# Altium PCB PCB.PcbDoc
Units mm, origin at the board's own origin, x right, y up, seen from the top; angles counter-clockwise.
Board outline 26 x 26 mm, 4 copper layers (Top Layer, GND, Power, Bottom Layer), stack 1.586 mm thick; 37 components, 23 nets, 158 pads, 109 vias.
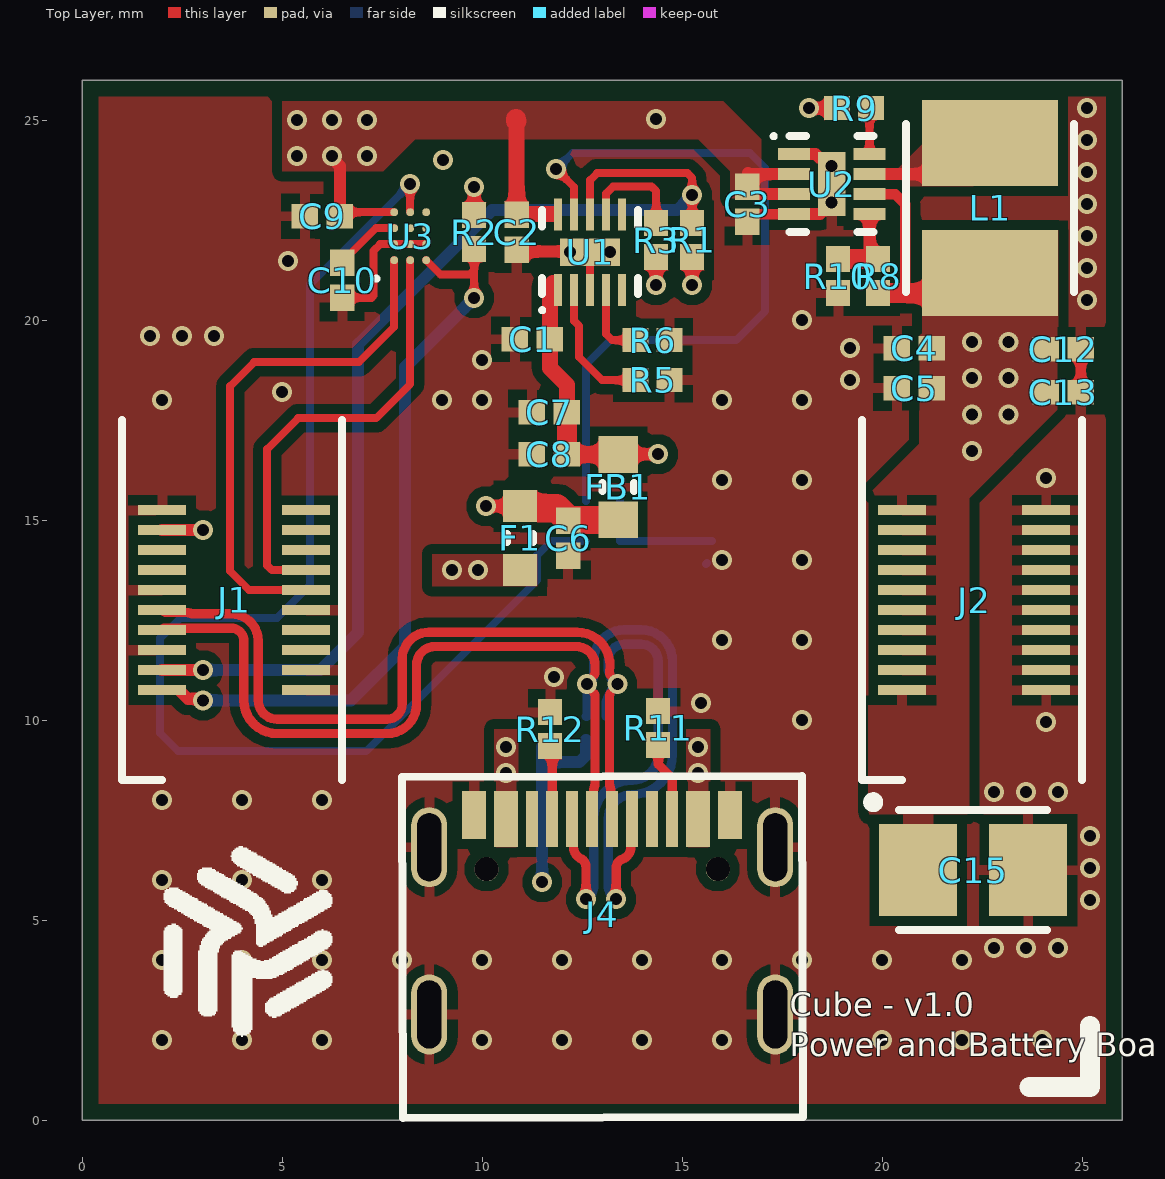
[diagram p0: Top Layer view]
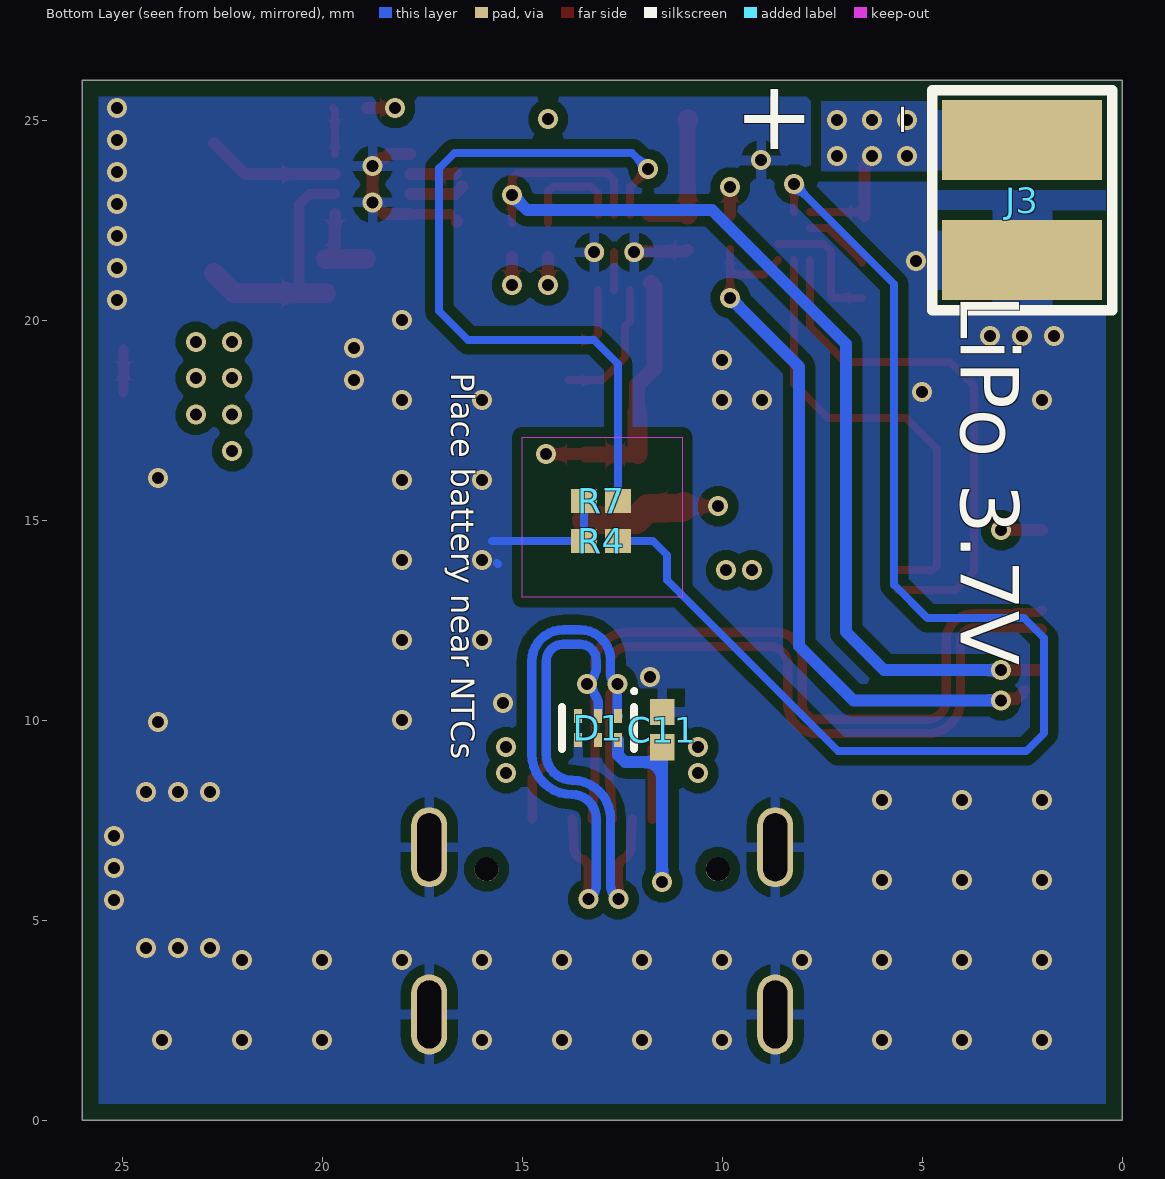
[diagram p1: Bottom Layer view, seen from below]
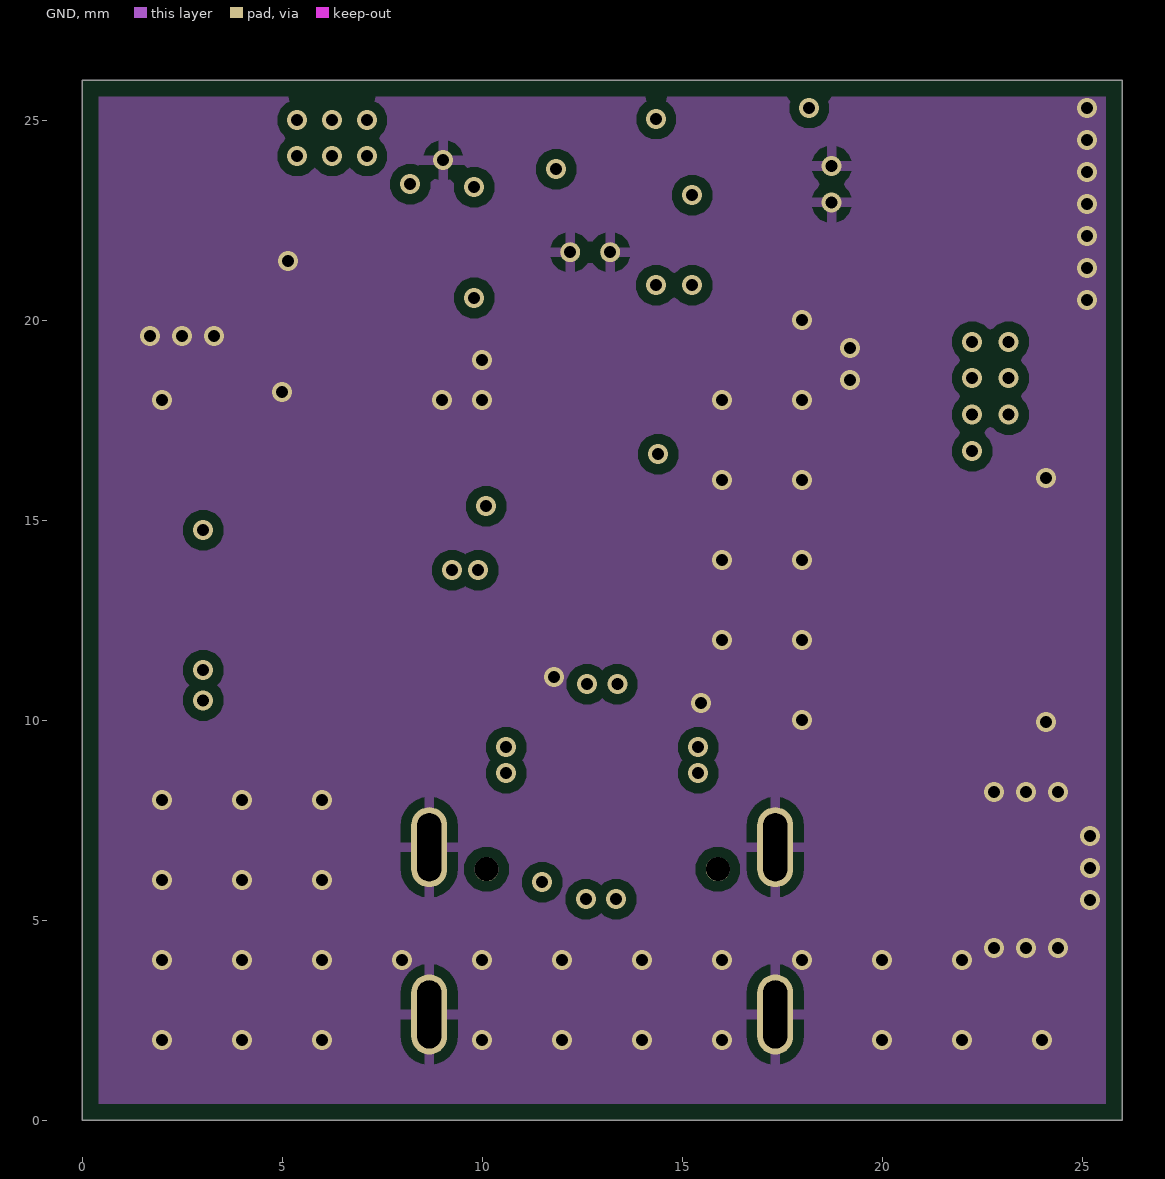
[diagram p2: GND]
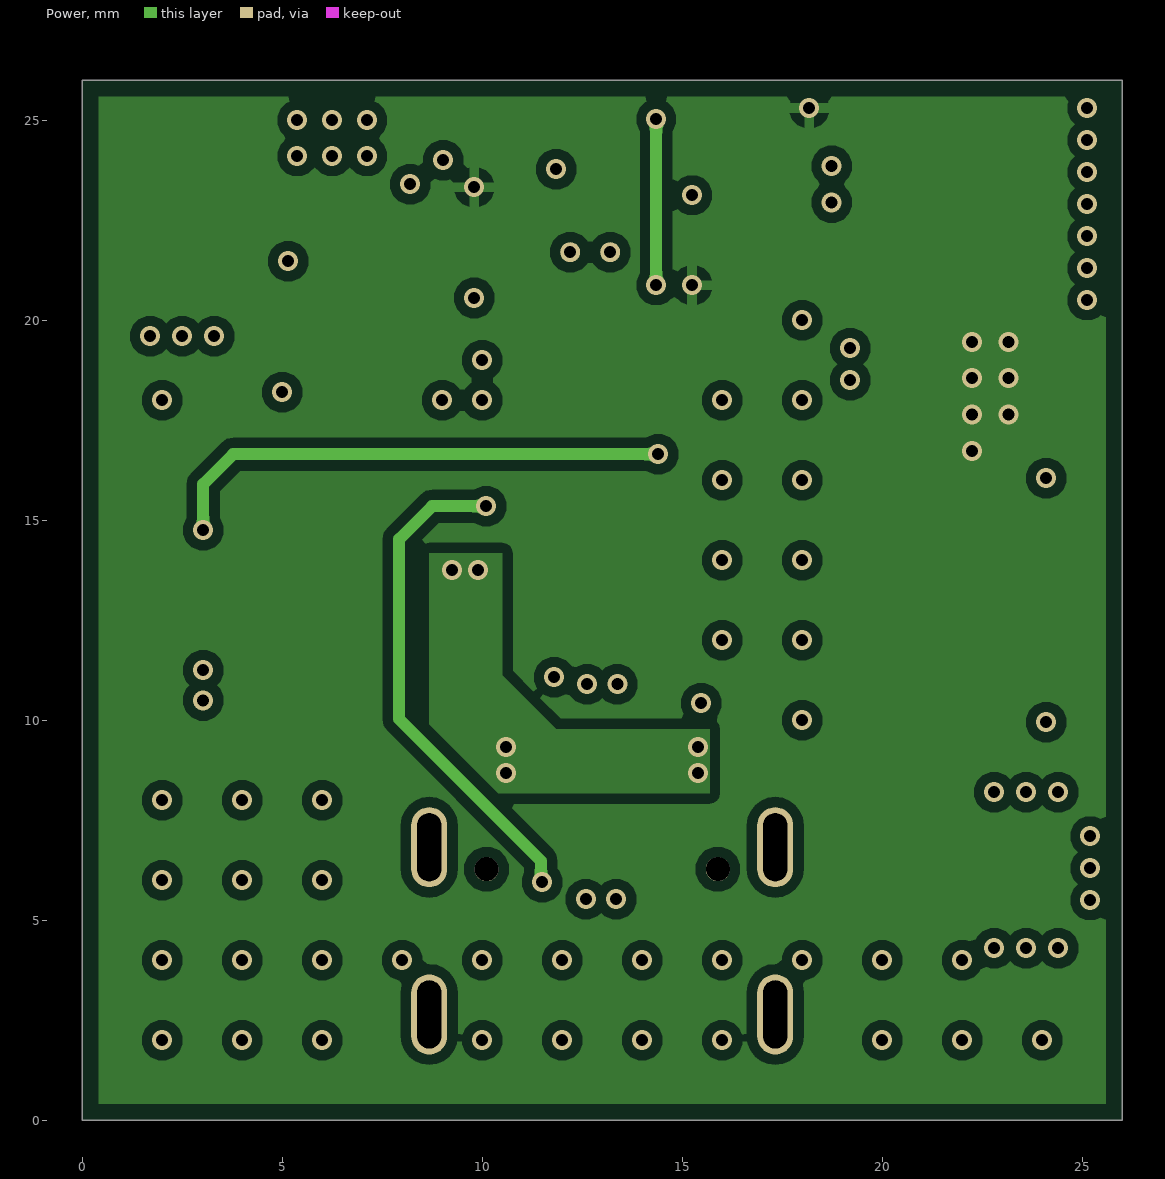
[diagram p3: Power]

## Layer stack, top to bottom
Top Solder: solder mask 0.0102, Solder Resist, Dk 3.5
Top Layer: signal copper 0.035
Dielectric 2: prepreg 0.2104, PP-006, Dk 4.6
GND: signal copper 0.0152
Dielectric 1: core 1.065, Core-025, Dk 4.6
Power: signal copper 0.0152
Dielectric 3: prepreg 0.2104, PP-006, Dk 4.6
Bottom Layer: signal copper 0.035
Bottom Solder: solder mask 0.0102, Solder Resist, Dk 3.5

## Board outline
0,0 0,26 26,26 26,0

## Design rules (kind name [scope] priority, off if disabled: settings)
BoardOutlineClearance [All] p1: gap=0.4 ignorepadtopadclearanceinfootprint=FALSE
Clearance [All] p1: gap=0.254 ignorepadtopadclearanceinfootprint=FALSE except(0: Arc-Hole Track-Hole SMDPad-Hole THPad-Hole Via-Hole Fill-Hole Poly-Hole Region-Hole Text-Hole; 0.09: Arc-Arc Arc-Track Track-Track; 0.127: SMDPad-SMDPad; 0.2: Arc-SMDPad Track-SMDPad; 0.33: Arc-THPad Track-THPad; 0.5: THPad-THPad)
DiffPairsRouting DiffPairs_USB [InDifferentialPairClass('USB')] p1: maxlimit=0.254 minlimit=0.127 mostfreqgap=0.254 toplayer_maxgap=0.127 toplayer_prefgap=0.127 toplayer_minwidth=0.232 toplayer_maxwidth=0.232 toplayer_prefwidth=0.232 bottomlayer_maxgap=0.127 bottomlayer_prefgap=0.127 bottomlayer_minwidth=0.232 bottomlayer_maxwidth=0.232 bottomlayer_prefwidth=0.232 impedanceprofiledriven=TRUE impedanceprofileid={58094A1F-92C8-4BD8-B7AC-1BFEEA8435DD} impedanceprofilevalue=90.000000 maxuncoupledlength=12.7
DiffPairsRouting [All] p2: maxlimit=0.254 minlimit=0.254 mostfreqgap=0.254 toplayer_minwidth=0.381 toplayer_maxwidth=0.381 toplayer_prefwidth=0.381 midlayer1_minwidth=0.381 midlayer1_maxwidth=0.381 midlayer1_prefwidth=0.381 midlayer2_minwidth=0.381 midlayer2_maxwidth=0.381 midlayer2_prefwidth=0.381 bottomlayer_minwidth=0.381 bottomlayer_maxwidth=0.381 bottomlayer_prefwidth=0.381 maxuncoupledlength=12.7
PolygonConnect [All] p1: connectstyle=Relief reliefconductorwidth=0.254 reliefentries=4 polygonreliefangle="90 Angle" airgapwidth=0.254
PolygonConnect PolygonConnect_5V [InNet('+5V') vs InNet('+5V')] p2: thpad.connectstyle=Direct thpad.reliefconductorwidth=0.254 thpad.reliefentries=4 thpad.polygonreliefangle="90 Angle" thpad.airgapwidth=0.254 smdpad.connectstyle=Direct smdpad.reliefconductorwidth=0.254 smdpad.reliefentries=4 smdpad.polygonreliefangle="90 Angle" smdpad.airgapwidth=0.254 via.connectstyle=Relief via.reliefconductorwidth=0.254 via.reliefentries=4 via.polygonreliefangle="90 Angle" via.airgapwidth=0.254
PolygonConnect PolygonConnect_VBAT [InNet('+VBAT') vs InNet('+VBAT')] p3: thpad.connectstyle=Direct thpad.reliefconductorwidth=0.254 thpad.reliefentries=4 thpad.polygonreliefangle="90 Angle" thpad.airgapwidth=0.254 smdpad.connectstyle=Direct smdpad.reliefconductorwidth=0.254 smdpad.reliefentries=4 smdpad.polygonreliefangle="90 Angle" smdpad.airgapwidth=0.254 via.connectstyle=Relief via.reliefconductorwidth=0.254 via.reliefentries=4 via.polygonreliefangle="90 Angle" via.airgapwidth=0.254
RoutingVias [All] p1: holewidth=0.711 width=1.27 viastyle="Through Hole" minholewidth=0.2 minwidth=0.4 maxholewidth=0.711 maxwidth=1.27
SolderMaskExpansion [All] p1: expansion=0.102 istentingtop=FALSE
Width [All] p1: maxlimit=2 minlimit=0.09 preferedwidth=0.254 minimp=50.000000 maximp=50.000000 favimp=50.000000
29 further rules are at their usual default settings.

## Classes and differential pairs
net class USB: USB_N USB_P
differential pair class USB: USB
component class "04 USB": C6 C7 C8 C11 D1 F1 FB1 J4 R11 R12
component class "03 BATTERY MANAGEMENT": C1 C2 C3 C4 C5 C9 C10 C12 C13 C15 J3 L1 R1 R2 R3 R4 R5 R6 R7 R8 R9 R10 U1 U2 U3
component class "02 CONNECTION": J1 J2
differential pair USB: +USB_P -USB_N

## Components (designator, comment, footprint, x,y, rotation, side; value= is the part's Value field where it differs from the comment)
C1 "4.7uF/10V" CAPC1005X06N 11.25,19.525 r0 top
C2 "4.7uF/10V" CAPC1005X06N 10.862,22.2 r90 top
C3 "10uF/6.3V" CAPC1005X06N 16.625,22.9 r90 top
C4 "10uF/6.3V" CAPC1005X06N 20.8,19.3 r0 top
C5 "10uF/6.3V" CAPC1005X06N 20.8,18.3 r0 top
C6 "10nF/50V" CAPC1005X06N 12.15,14.55 r90 top
C7 "100nF/50V" CAPC1005X06N 11.675,17.7 r0 top
C8 "4.7uF/10V" CAPC1005X06N 11.675,16.65 r0 top
C9 "1uF/25V" CAPC1005X06N 6,22.6 r0 top
C10 "2.2uF/6.3V" CAPC1005X06N 6.5,21 r90 top
C11 "100nF/50V" CAPC1005X06N 11.5,9.765 r270 bottom
C12 "10uF/6.3V" CAPC1005X06N 24.525,19.275 r180 top
C13 "2.2uF/6.3V" CAPC1005X06N 24.525,18.2 r180 top
C15 "100uF/6.3V" CAPMP3528X21N 22.275,6.25 r0 top
D1 "TPD4S012DRYR" SON50P100X60-6N 13.1,9.8 r270 bottom
F1 "1.5A/32V" F0603HI1500V032T 10.95,14.55 r90 top
FB1 "1.8A" INDC1608X10N 13.4,15.825 r90 top
J1 "0537480208" 0537480208 2,10.75 r90 top
J2 "0537480208" 0537480208 20.5,10.75 r90 top
J3 "3.7V/500mAh" BATTERY_SMD_CONN 2.5,24.5 r270 bottom
J4 "TYPE-C-31-M-12" TYPE-C-31-M-12 13,7.325 r0 top
L1 "2.2uH/1.32A" INDP4040X12N 22.7,22.8 r270 top
R1 "100K/1%" RESC1005X04N 15.25,22 r90 top
R2 "100K/1%" RESC1005X04N 9.8,22.2 r270 top
R3 "0" RESC1005X04N 14.35,22 r270 top
R4 "10K" RESC1005X04N 13.025,14.475 r180 bottom
R5 "1K4/1%" RESC1005X04N 14.262,18.5 r180 top
R6 "2K8/1%" RESC1005X04N 14.262,19.5 r180 top
R7 "10K" RESC1005X04N 13.025,15.475 r180 bottom
R8 "562k/1%" RESC1005X04N 19.9,21.1 r270 top
R9 "100K/1%" RESC1005X04N 19.3,25.3 r0 top
R10 "180K/1%" RESC1005X04N 18.9,21.1 r90 top
R11 "5K11/1%" RESC1005X04N 14.4,9.8 r270 top
R12 "5K11/1%" RESC1005X04N 11.7,9.775 r270 top
U1 "BQ24045DSQR" SON40P200X80_HS-11N 12.7,21.7 r90 top
U2 "TPS62160DSGR" SON50P200X80_HS-9N 18.738,23.4 r0 top
U3 "LC709204FXE-01TBG" BGA12C40P4X3_191X148X51 8.2,22.1 r90 top

## Footprints (in the part's own frame and the unit in brackets; to place one, negate y for a bottom-side part, rotate by r counter-clockwise, add the part's x,y. Pads: shape width x height; smd on the part's side, far side on the other; paste and mask are expansions set on the pad)
0537480208 [mm]
  rect 0.25x1.2 smd: 1(0,0) 2(0.5,0) 3(1,0) 4(1.5,0) 5(2,0) 6(2.5,0) 7(3,0) 8(3.5,0) 9(4,0) 10(4.5,0) 11(0,-3.6) 12(0.5,-3.6) 13(1,-3.6) 14(1.5,-3.6) 15(2,-3.6) 16(2.5,-3.6) 17(3,-3.6) 18(3.5,-3.6) 19(4,-3.6) 20(4.5,-3.6)
  silkscreen extent -2.25,-4.5 6.75,1, body extent -2.15,-3.9 6.65,0.4, height 2.44
BATTERY_SMD_CONN [mm]
  rect 2x4 smd: 1(0,0) 2(3,0)
  silkscreen extent -1.25,-2.25 4.25,2.25
BGA12C40P4X3_191X148X51 [mm] "BGA, 12-Leads, Body 1.91x1.48mmx0.51mm, Pitch 0.40mm"
  round 0.2 smd: A1(-0.6,0.4) A2(-0.2,0.4) A3(0.2,0.4) A4(0.6,0.4) B1(-0.6,0) B2(-0.2,0) B3(0.2,0) B4(0.6,0) C1(-0.6,-0.4) C2(-0.2,-0.4) C3(0.2,-0.4) C4(0.6,-0.4)
  silkscreen extent -1.11,0.79 -1.01,0.89, body extent -0.96,-0.74 0.95,0.74, height 0.51
CAPC1005X06N [mm] "Chip Capacitor, 2-Leads, Body 1.00x0.50mm, IPC Medium Density"
  rect 0.66x0.62 smd: 1(-0.44,0) 2(0.44,0)
  body extent -0.53,-0.28 0.53,0.27, height 0.55
CAPMP3528X21N [mm] "Molded Capacitor, 2-Leads, Body 3.50x2.80mm, IPC Medium Density"
  rect 1.95x2.3 smd: 1(-1.375,0) 2(1.375,0)
  silkscreen extent -2.62,-1.5 1.85,1.82, body extent -1.85,-1.5 1.85,1.5, height 2.1
F0603HI1500V032T [mm] "F0603HI1500V032T"
  rect 0.8x0.85 smd: 1(-0.8,0) 2(0.8,0)
  silkscreen extent -0.1,-0.33 0.1,0.33, body extent -0.8,-0.4 0.8,0.4, height 0.95
INDC1608X10N [mm] "Chip Inductor, 2-Leads, Body 1.65x0.80mm, IPC Medium Density"
  rect 0.92x0.98 smd: 1(-0.815,0) 2(0.815,0)
  silkscreen extent -0.1,-0.39 0.1,0.39, body extent -0.9,-0.48 0.9,0.47, height 0.95
INDP4040X12N [mm] "Precision Wire Wound Inductor, 2-Leads, Body 4.00x4.00mm, IPC Medium Density"
  rect 2.15x3.4 smd: 1(-1.625,0) 2(1.625,0)
  silkscreen extent -2.1,-2.1 2.1,2.1, body extent -2.1,-2.1 2.1,2.1, height 1.2
RESC1005X04N [mm] "Chip Resistor, 2-Leads, Body 1.00x0.50mm, IPC Medium Density"
  rect 0.65x0.6 smd: 1(-0.425,0) 2(0.425,0)
  body extent -0.55,-0.3 0.55,0.3, height 0.4
SON40P200X80_HS-11N [mm] "SON, 10-Leads, Body 2.00x2.00mm, Pitch 0.40mm, Thermal Pad 1.50x0.69mm, IPC Medium Density"
  rect 0.8x0.2 smd: 1(-0.945,0.8) 2(-0.945,0.4) 3(-0.945,0) 4(-0.945,-0.4) 5(-0.945,-0.8) 6(0.945,-0.8) 7(0.945,-0.4) 8(0.945,0) 9(0.945,0.4) 10(0.945,0.8)
  round 0.5 hole 0.3 mask+0.102: 11(0,0.5) 11(0,-0.5)
  rect 0.69x1.5 smd paste-2539.97: 11(0,0)
  silkscreen extent -1.5,-1.2 1.05,1.25, body extent -1.05,-1.05 1.05,1.05, height 0.8
SON50P100X60-6N [mm] "SON, 6-Leads, Body 1.45x1.00mm, Pitch 0.50mm, IPC Medium Density"
  rect 0.35x0.2 smd: 1(-0.3,0.5) 2(-0.3,0) 3(-0.3,-0.5) 4(0.3,-0.5) 5(0.3,0) 6(0.3,0.5)
  silkscreen extent -0.97,-0.9 0.53,0.95, body extent -0.53,-0.75 0.53,0.75, height 0.6
SON50P200X80_HS-9N [mm] "SON, 8-Leads, Body 2.00x2.00mm, Pitch 0.50mm, Thermal Pad 1.60x0.69mm, IPC Medium Density"
  rect 0.8x0.3 smd: 1(-0.945,0.75) 2(-0.945,0.25) 3(-0.945,-0.25) 4(-0.945,-0.75) 5(0.945,-0.75) 6(0.945,-0.25) 7(0.945,0.25) 8(0.945,0.75)
  rect 0.69x1.6 smd paste-2539.97: 9(0,0)
  silkscreen extent -1.5,-1.2 1.05,1.25, body extent -1.05,-1.05 1.05,1.05, height 0.8
TYPE-C-31-M-12 [mm] "TYPE-C-31-M-12"
  rect 0.6x1.2 smd: A1/B12(-3.2,0.3) B1/A12(3.2,0.3)
  rect 0.6x1.4 smd: A4/B9(-2.4,0.2) B4/A9(2.4,0.2)
  rect 0.3x1.4 smd: A5(-1.25,0.2) A6(-0.25,0.2) A7(0.25,0.2) A8(1.25,0.2) B5(1.75,0.2) B6(0.75,0.2) B7(-0.75,0.2) B8(-1.75,0.2)
  round 0.6 hole 0.6 unplated paste-2539.97: None(-2.89,-1.05) None(2.89,-1.05)
  rrect100% 0.9x2 hole 0.6 slot 1.7 at 90 deg unplated paste-2539.97: Shield(-4.325,-4.68) Shield(-4.325,-0.5) Shield(4.325,-4.68) Shield(4.325,-0.5)
  silkscreen extent -5,-7.27 5.02,1.28, body extent -4.47,-7.3 4.47,0.6, height 3.22

## Part data
C1 C2 C8: library part CL05A475MP5NRNC, "10V 4.7uF X5R ±20% 0402  Multilayer Ceramic Capacitors MLCC - SMD/SMT ROHS", manufacturer="Samsung Electro-Mechanics", assembler_number=C23733, datasheet=https://datasheet.lcsc.com/lcsc/1810191211_Samsung-Electro-Mechanics-CL05A475MP5NRNC_C23733.pdf, mfr_part_number=CL05A475MP5NRNC
C3 C4 C5 C12: library part CL05A106MQ5NUNC, "6.3V 10uF X5R ±20% 0402  Multilayer Ceramic Capacitors MLCC - SMD/SMT ROHS", manufacturer="Samsung Electro-Mechanics", assembler_number=C15525, datasheet=https://datasheet.lcsc.com/lcsc/2208231630_Samsung-Electro-Mechanics-CL05A106MQ5NUNC_C15525.pdf, mfr_part_number=CL05A106MQ5NUNC
C6: library part CL05B103KB5NNNC, "50V 10nF X7R ±10% 0402  Multilayer Ceramic Capacitors MLCC - SMD/SMT ROHS", manufacturer="Samsung Electro-Mechanics", assembler_number=C15195, datasheet=https://datasheet.lcsc.com/lcsc/1810191223_Samsung-Electro-Mechanics-CL05B103KB5NNNC_C15195.pdf, mfr_part_number=CL05B103KB5NNNC
C7 C11: library part CL05B104KO5NNNC, "16V 100nF X7R ±10% 0402  Multilayer Ceramic Capacitors MLCC - SMD/SMT ROHS", manufacturer="Samsung Electro-Mechanics", assembler_number=C1525, datasheet=https://datasheet.lcsc.com/lcsc/1810191219_Samsung-Electro-Mechanics-CL05B104KO5NNNC_C1525.pdf, mfr_part_number=CL05B104KO5NNNC
C9: library part CL05A105KA5NQNC, "25V 1uF X5R ±10% 0402  Multilayer Ceramic Capacitors MLCC - SMD/SMT ROHS", manufacturer="Samsung Electro-Mechanics", assembler_number=C52923, datasheet=https://datasheet.lcsc.com/lcsc/1811091611_Samsung-Electro-Mechanics-CL05A105KA5NQNC_C52923.pdf, mfr_part_number=CL05A105KA5NQNC
C10 C13: library part CL05A225MQ5NSNC, "6.3V 2.2uF X5R ±20% 0402  Multilayer Ceramic Capacitors MLCC - SMD/SMT ROHS", manufacturer="Samsung Electro-Mechanics", assembler_number=C12530, datasheet=https://datasheet.lcsc.com/lcsc/1811021410_Samsung-Electro-Mechanics-CL05A225MQ5NSNC_C12530.pdf, mfr_part_number=CL05A225MQ5NSNC
C15: library part TAJB107K006RNJ, "100uF 6.3V -55℃~+125℃ 1.7Ω@100kHz ±10% CASE-B_3528 Tantalum Capacitors ROHS", manufacturer="Kyocera AVX", assembler_number=C16133, datasheet=https://datasheet.lcsc.com/lcsc/2111161030_Kyocera-AVX-TAJB107K006RNJ-_C16133.pdf, mfr_part_number=TAJB107K006RNJ
D1: "3A 5.5V 6V Unidirectional SON-6  ESD Protection Devices ROHS", manufacturer="Texas Instruments", assembler_number=C96506, datasheet=https://www.ti.com/cn/lit/gpn/tpd4s012, mfr_part_number=TPD4S012DRYR
F1: library part F0603HI1500V032T, "50A SMD Ceramic Fuse 1.5A 0.11 101mΩ 0603  Fuses ROHS", manufacturer=AEM, assembler_number=C96550, datasheet=https://datasheet.lcsc.com/lcsc/1810241823_AEM-F0603HI1500V032T_C96550.pdf, mfr_part_number=F0603HI1500V032T
FB1: library part UPZ1608G300-1R8TF, "1.8A 1 60mΩ 30Ω@100MHz ±25% 0603  Ferrite Beads ROHS", manufacturer=Sunlord, assembler_number=C919159, datasheet=https://datasheet.lcsc.com/lcsc/2110100030_Sunlord-UPZ1608G300-1R8TF_C919159.pdf, mfr_part_number=UPZ1608G300-1R8TF
J1 J2: "CONN PLUG 20POS SMD GOLD", manufacturer=MOLEX, assembler_number=C564063, datasheet=https://datasheet.lcsc.com/lcsc/2206301915_MOLEX-537480208_C564063.pdf, mfr_part_number=0537480208
J3: library part SMD_Connector_2Pole, "SMD_Connector_2Pole"
J4: "5A 1 16 Female Type-C SMD  USB Connectors ROHS", manufacturer="Korean Hroparts Elec", assembler_number=C165948, datasheet=https://datasheet.lcsc.com/lcsc/2205251630_Korean-Hroparts-Elec-TYPE-C-31-M-12_C165948.pdf, mfr_part_number=TYPE-C-31-M-12
L1: library part FNR4012S2R2MT, "1.32A 2.2uH ±20% 104mΩ SMD  Power Inductors ROHS", manufacturer="cjiang(Changjiang Microelectronics Tech)", assembler_number=C167776, datasheet=https://datasheet.lcsc.com/lcsc/1806060533_cjiang-Changjiang-Microelectronics-Tech-FNR4012S2R2MT_C167776.pdf, mfr_part_number=FNR4012S2R2MT
R1 R2 R9: library part 0402WGF1003TCE, "62.5mW Thick Film Resistors 50V ±100ppm/℃ ±1% -55℃~+155℃ 100kΩ 0402  Chip Resistor - Surface Mount ROHS", manufacturer="UNI-ROYAL(Uniroyal Elec)", assembler_number=C25741, datasheet=https://datasheet.lcsc.com/lcsc/2206010100_UNI-ROYAL-Uniroyal-Elec-0402WGF1003TCE_C25741.pdf, mfr_part_number=0402WGF1003TCE
R3: library part 0402WGF0000TCE, "62.5mW Thick Film Resistors 50V ±800ppm/℃ ±1% -55℃~+155℃ 0Ω 0402  Chip Resistor - Surface Mount ROHS", manufacturer="UNI-ROYAL(Uniroyal Elec)", assembler_number=C17168, datasheet=https://datasheet.lcsc.com/lcsc/2206010216_UNI-ROYAL-Uniroyal-Elec-0402WGF0000TCE_C17168.pdf, mfr_part_number=0402WGF0000TCE
R4 R7: library part SDNT1608X103F3950FTF, "10kΩ -55℃~+125℃ 0.33mA 100mW ±1% 3950K ±1% 0603  NTC Thermistors ROHS", manufacturer=Sunlord, assembler_number=C279936, datasheet=https://datasheet.lcsc.com/lcsc/2110081430_Sunlord-SDNT1608X103F3950FTF_C279936.pdf, mfr_part_number=SDNT1608X103F3950FTF
R5: library part 0402WGF1401TCE, "62.5mW Thick Film Resistors 50V ±100ppm/℃ ±1% -55℃~+155℃ 1.4kΩ 0402  Chip Resistor - Surface Mount ROHS", manufacturer="UNI-ROYAL(Uniroyal Elec)", assembler_number=C39650, datasheet=https://datasheet.lcsc.com/lcsc/2206010000_UNI-ROYAL-Uniroyal-Elec-0402WGF1401TCE_C39650.pdf, mfr_part_number=0402WGF1401TCE
R6: library part WR04X2801FTL, "62.5mW 50V ±100ppm/℃ ±1% -55℃~+155℃ 2.8kΩ 0402  Chip Resistor - Surface Mount ROHS", manufacturer="Walsin Tech Corp", assembler_number=C172044, datasheet=https://datasheet.lcsc.com/lcsc/1810191632_Walsin-Tech-Corp-WR04X2801FTL_C172044.pdf, mfr_part_number=WR04X2801FTL
R8: library part 0402WGF5623TCE, "62.5mW Thick Film Resistors 50V ±100ppm/℃ ±1% -55℃~+155℃ 562kΩ 0402  Chip Resistor - Surface Mount ROHS", manufacturer="UNI-ROYAL(Uniroyal Elec)", assembler_number=C48838, datasheet=https://datasheet.lcsc.com/lcsc/2206010000_UNI-ROYAL-Uniroyal-Elec-0402WGF5623TCE_C48838.pdf, mfr_part_number=0402WGF5623TCE
R10: library part 0402WGF1803TCE, "62.5mW Thick Film Resistors 50V ±100ppm/℃ ±1% -55℃~+155℃ 180kΩ 0402  Chip Resistor - Surface Mount ROHS", manufacturer="UNI-ROYAL(Uniroyal Elec)", assembler_number=C25760, datasheet=https://datasheet.lcsc.com/lcsc/2206010100_UNI-ROYAL-Uniroyal-Elec-0402WGF1803TCE_C25760.pdf, mfr_part_number=0402WGF1803TCE
R11 R12: library part RC-02W5111FT, "62.5mW 50V ±1% ±200ppm/℃ -55℃~+155℃ 5.11kΩ 0402  Chip Resistor - Surface Mount ROHS", manufacturer="FH (Guangdong Fenghua Advanced Tech)", assembler_number=C310235, datasheet=https://datasheet.lcsc.com/lcsc/1912111437_FH--Guangdong-Fenghua-Advanced-Tech-RC-02W5111FT_C310235.pdf, mfr_part_number=RC-02W5111FT
U1: "WSON-10  Battery Management ICs ROHS", manufacturer="Texas Instruments", assembler_number=C148983, datasheet=https://www.ti.com/lit/ds/symlink/bq24045.pdf?HQS=dis-dk-null-digikeymode-dsf-pf-null-wwe&ts=1671793040477&ref_url=https%253A%252F%252Fwww.ti.com%252Fgeneral%252Fdocs%252Fsuppproductinfo.tsp%253FdistId%253D10%2526gotoUrl%253Dhttps%253A%252F%252Fwww.ti.com%252Flit%252Fgpn%252Fbq24045, mfr_part_number=BQ24045DSQR
U2: "Step-down type WSON-8  DC-DC Converters ROHS", manufacturer="Texas Instruments", assembler_number=C324077, datasheet=https://www.ti.com/cn/lit/gpn/tps62160, mfr_part_number=TPS62160DSGR
U3: "WLCSP12(1.48x1.91x0.51)  Battery Management ICs ROHS", manufacturer=onsemi, assembler_number=C895466, datasheet=https://datasheet.lcsc.com/lcsc/2108140630_onsemi-LC709204FXE-01TBG_C895466.pdf, mfr_part_number=LC709204FXE-01TBG

## Via types
v1: diameter 0.5, hole 0.3, Top Layer to Bottom Layer, tented both sides, 109 vias

## Nets (pads, with @x,y where several pads share a name; then routed paths per layer and width w, separated by ;. In a path a pad name is that pad's centre, name@x,y a point inside that pad or via, vN(x,y) a via of type N, cw(c..) or ccw(c..) an arc to the next point about the centre after c; other vN are vias at no path point)
+3V3: C4.2 C5.2 C12.2 C13.2 C15.1 J2.1 J2.2 J2.3 J2.4 J2.5 J2.6 J2.7 J2.8 J2.9 J2.10 L1.2 R1.1 R2.1 R8.2 R9.1 U2.6 | length 8.3
  Top Layer w0.254: U2.6 20.325,23.15 20.575,22.9 20.575,20.7 20.6,20.675
  Top Layer w0.3: R2.1 v1(9.8,23.325) ; v1(15.25,20.875) R1.1 ; v1(18.175,25.3) R9.1
  Top Layer w0.5: R8.2 20.6,20.675 22.2,20.675 L1.2
  other v1: 22.25,16.73 22.25,17.64 23.16,17.64 22.25,18.55 23.16,18.55 22.25,19.46 23.16,19.46
+5V: C1.2 C7.2 C8.2 FB1.2 J1.9 U1.1 | length 20.7
  Top Layer w0.3: J1.9 v1(3.025,14.75) ; FB1.2@13.395,16.645 13.4,16.65 v1(14.4,16.65)
  Top Layer w0.4: 11.775,20.925 11.69,20.84 C1.2 11.69,18.81 12.125,18.375 12.125,17.71 C7.2 ; C8.2 12.12,16.645 13.395,16.645 FB1.2
  Top Layer w0.5: C8.2 C7.2
  Power w0.3: v1(3.025,14.75) 3.025,15.9 3.775,16.65 v1(14.4,16.65)
+VBAT: C2.2 C3.2 C9.2 J3.1 R3.2 U1.10 U2.2 U2.3 U3.A4 | length 13.7
  Top Layer w0.2: C9.2@6.54,22.7 U3.A4
  Top Layer w0.3: v1(6.25,24.1) 6.25,24.046 6.44,23.856 C9.2 C9.2@6.54,22.7 ; v1(14.35,20.875) R3.2 ; C3.2@16.5,23.34 16.5,23.32 16.67,23.15 U2.3 ; 16.65,23.675 16.675,23.65 U2.2
  Top Layer w0.4: C2.2 10.862,24.975 ; C2.2@10.872,22.65 U1.10@11.8,22.65
  Top Layer w0.5: 10.85,25.025 10.85,24.975 10.862,24.975 ; C2.2 C2.2@10.872,22.65
  Power w0.3: v1(14.35,20.875) v1(14.35,25.025)
  other v1: 5.375,24.1 7.125,24.1 5.375,25 6.25,25 7.125,25
+VBUS: C6.2 C11.2 D1.6 F1.2 FB1.1 | length 20.9
  Top Layer w0.3: v1(10.1,15.35) F1.2
  Top Layer w0.7: F1.2 11,15.3 11.86,15.3 12.16,15 13.39,15 FB1.1
  Power w0.3: v1(10.1,15.35) 8.749,15.35 7.925,14.526 7.925,10.025 11.468,6.482 11.468,5.982 v1(11.5,5.95)
  Bottom Layer w0.3: v1(11.5,5.95) 11.5,8.95 ; C11.2 11.5,8.95 ; D1.6 12.6,9.126 12.424,8.95 11.5,8.95
BQ_CHGn: J1.2 R1.2 U1.8 | length 27
  Top Layer w0.2: U1.8 12.7,23.5 12.875,23.675 15.133,23.675 15.25,23.558 v1(15.25,23.125) R1.2
  Top Layer w0.3: J1.2 v1(3.025,11.25)
  Bottom Layer w0.3: v1(3.025,11.25) 5.95,11.25 6.9,12.2 6.9,19.4 10.25,22.75 14.875,22.75 v1(15.25,23.125)
BQ_ISET: R5.2 U1.2 | length 3.4
  Top Layer w0.2: U1.2 12.3,19.979 12.425,19.854 12.425,19.075 13,18.5 R5.2
BQ_PT: R6.2 U1.4 | length 1.9
  Top Layer w0.2: U1.4 13.1,19.65 13.25,19.5 R6.2
GND: C1.1 C2.1 C3.1 C4.1 C5.1 C6.1 C7.1 C8.1 C9.1 C10.1 C11.1 C12.1 C13.1 C15.2 D1.4 J1.3 J1.6 J1.10 J1.11 J1.12 J1.15 J2.11 J2.12 J2.13 J2.14 J2.15 J2.16 J2.17 J2.18 J2.19 J2.20 J3.2 J4.A1/B12 J4.B1/A12 J4.Shield R4.1 R5.1 R6.1 R7.1 R10.1 R11.1 R12.1 U1.3 U1.11 U2.1 U2.4 U2.9 U3.A2 U3.B2 U3.C2 | length 14.1
  Top Layer w0.2: C10.1 7.231,20.56 7.285,20.615 7.285,21.735 7.45,21.9 U3.A2 U3.B2 U3.C2 ; U1.3 U1.11@12.7,21.7
  Top Layer w0.254: C3.1@16.795,22.65 U2.4 ; C13.1 C12.1
  Top Layer w0.3: C2.1 10.903,21.719 12.181,21.719 U1.11@12.2,21.7 ; C3.1 C3.1@16.625,22.48 ; U2.4 18.443,22.65 v1(18.738,22.945) U2.9 v1(18.738,23.855) 18.543,24.05 18.438,24.05 18.338,24.15 U2.1
  Bottom Layer w0.2: R7.1 R4.1 15.75,14.475 ; 15.6,13.9 15.625,13.925
  other v1: 2,2 4,2 6,2 10,2 12,2 14,2 16,2 20,2 22,2 24,2 2,4 4,4 6,4 8,4 10,4 12,4 14,4 16,4 18,4 20,4 22,4 22.8,4.3 23.6,4.3 24.4,4.3 25.2,5.5 2,6 4,6 6,6 25.2,6.3 25.2,7.1 2,8 4,8 6,8 22.8,8.2 23.6,8.2 24.4,8.2 24.1,9.95 18,10 15.475,10.425 11.8,11.075 16,12 18,12 16,14 18,14 16,16 18,16 24.1,16.05 2,18 9,18 10,18 16,18 18,18 5,18.2 19.2,18.5 10,19 19.2,19.3 1.7,19.6 2.5,19.6 3.3,19.6 18,20 25.125,20.5 25.125,21.3 5.15,21.475 25.125,22.1 25.125,22.9 25.125,23.7 9.025,24 25.125,24.5 25.125,25.3
LC_ALARM: J1.1 R2.2 U3.C1 | length 18.3
  Top Layer w0.2: U3.C1 8.961,21.139 9.683,21.139 9.8,21.256 ; v1(9.8,20.556) 9.8,21.256 ; R2.2 9.8,21.256
  Top Layer w0.3: J1.1@2.45,10.725 2.641,10.534 2.987,10.534 v1(3.025,10.496)
  Bottom Layer w0.3: v1(3.025,10.496) 6.721,10.496 8.075,11.85 8.075,18.831 v1(9.8,20.556)
LC_REG: C10.2 U3.A3 | length 1.7
  Top Layer w0.2: C10.2 6.5,21.46 7.34,22.3 U3.A3
LC_TSENS: R4.2 U3.B4 | length 31.8
  Top Layer w0.2: U3.B4 v1(8.2,23.4)
  Bottom Layer w0.2: v1(8.2,23.4) 5.7,20.9 5.7,13.385 4.865,12.55 2.45,12.55 1.95,12.05 1.95,9.675 2.4,9.225 7.1,9.225 11.375,13.5 11.375,14.125 11.725,14.475 R4.2
NetF1_1: F1.1 J4.A4/B9 J4.B4/A9
  other v1: 10.6,8.675 15.4,8.675 10.6,9.325 15.4,9.325 9.25,13.75 9.9,13.75
NetJ1_16: J1.16 U3.A1 | length 13.1
  Top Layer w0.2: J1.16 4.175,13.25 3.7,13.725 3.7,18.35 4.3,18.95 6.915,18.95 7.8,19.835 U3.A1
NetJ1_17: J1.17 U3.B1 | length 11.3
  Top Layer w0.2: J1.17 4.742,13.75 4.625,13.867 4.625,16.775 5.4,17.55 7.35,17.55 8.2,18.4 U3.B1
NetJ4_A5: J4.A5 R12.2 | length 1.8
  Top Layer w0.232: R12.2 11.75,9.3 11.75,8.6 J4.A5
NetJ4_B5: J4.B5 R11.2 | length 2
  Top Layer w0.232: R11.2 14.4,8.9 14.75,8.55 J4.B5
NetL1_1: L1.1 U2.7 | length 3.3
  Top Layer w0.3: U2.7 21.925,23.65 L1.1
NetR3_1: R3.1 U1.7 | length 2.7
  Top Layer w0.2: U1.7 13.1,23.169 13.276,23.345 14.233,23.345 14.35,23.228 R3.1
NetR7_2: R7.2 U1.9 | length 18.9
  Top Layer w0.2: v1(11.85,23.775) 12.3,23.325 U1.9
  Bottom Layer w0.2: v1(11.85,23.775) 12.251,24.176 16.699,24.176 17.075,23.8 17.075,20.225 16.35,19.5 13.2,19.5 12.6,18.9 R7.2
NetR9_2: R9.2 U2.8 | length 1.2
  Top Layer w0.2: U2.8 19.683,25.258 R9.2
TPS_FB: R8.1 R10.2 U2.5 | length 2.2
  Top Layer w0.3: U2.5 19.683,21.767 19.9,21.55 R8.1
  Top Layer w0.5: R10.2 R8.1
USB_N: D1.2 J1.5 J4.A7 J4.B7 | length 31.3
  Top Layer w0.232: J1.5 2.022,12.741 2.022,12.733 ccw(c2.154,12.924) 2.153,12.691 2.6,12.691 cw(c2.6,12.375) 2.707,12.673 ccw(c2.784,12.892) 2.783,12.659 3.725,12.659 cw(c3.725,11.984) 4.4,11.984 4.4,10.5 ccw(c4.875,10.5) 4.875,10.025 7.625,10.025 ccw(c7.625,10.4) 8,10.4 8,11.534 cw(c8.666,11.534) 8.408,12.148 cw(c8.666,11.534) 8.666,12.2 12.369,12.2 cw(c12.369,11.375) 13.18,11.222 ccw(c13.412,11.223) 13.197,11.136 ; J4.B7 12.284,6.941 12.284,6.825 ccw(c12.6,6.825) 12.463,6.54 cw(c12.361,6.331) 12.593,6.332 v1(12.593,5.525) ; 13.197,10.664 ccw(c13.412,10.577) 13.18,10.578 13.18,8.421 ccw(c13.412,8.422) 13.195,8.339 cw(c12.9,8.225) 13.216,8.225 13.216,8.109 J4.A7
  Bottom Layer w0.232: v1(12.593,5.525) ccw(c12.524,5.747) 12.749,5.687 cw(c13.347,5.525) 12.774,5.761 ccw(c12.558,5.848) 12.791,5.847 12.791,7.541 cw(c13.75,7.541) 13.75,8.5 ccw(c13.75,9.15) 14.4,9.15 14.4,11.475 ccw(c13.975,11.475) 13.975,11.9 13.55,11.9 ccw(c13.55,11.5) 13.15,11.5 13.15,11.286 ccw(c13.382,11.288) 13.174,11.184 cw(c12.623,10.9) 13.222,11.063 ccw(c13.446,11.122) 13.376,10.9 ccw(c13.446,10.678) 13.222,10.74 cw(c12.623,10.9) 13.139,10.555 ccw(c13.332,10.427) 13.1,10.428 D1.2
  other v1: 13.377,10.9
USB_P: D1.1 J1.4 J4.A6 J4.B6 | length 31.8
  Top Layer w0.232: J1.4 cw(c2.05,12.25) 2.05,12.3 3.725,12.3 cw(c3.725,11.984) 4.041,11.984 4.041,10.5 ccw(c4.875,10.5) 4.875,9.666 7.625,9.666 ccw(c7.625,10.4) 8.359,10.4 8.359,11.386 cw(c8.814,11.386) 8.814,11.841 12.355,11.841 cw(c12.355,11.375) 12.82,11.375 12.82,11.222 cw(c12.588,11.223) 12.803,11.136 ; J4.A6 12.784,8.109 12.784,8.225 cw(c13.1,8.225) 12.805,8.339 ccw(c12.588,8.422) 12.82,8.421 12.82,10.577 ccw(c12.588,10.577) 12.804,10.663 ; v1(13.347,5.525) 13.347,6.307 cw(c13.58,6.307) 13.502,6.526 ccw(c13.4,6.825) 13.716,6.825 13.716,6.941 J4.B6
  Bottom Layer w0.232: D1.1 ccw(c12.6,10.123) 12.623,10.123 v1(12.623,10.9) ; v1(12.623,10.9) ccw(c12.554,11.122) 12.778,11.062 cw(c13.377,10.9) 12.782,11.074 ccw(c12.558,11.138) 12.791,11.137 12.791,11.5 cw(c13.55,11.5) 13.55,12.259 13.975,12.259 cw(c13.975,11.475) 14.759,11.475 14.759,9.15 cw(c13.75,9.15) 13.75,8.141 ccw(c13.75,7.541) 13.15,7.541 13.15,5.847 ccw(c13.382,5.848) 13.167,5.761 cw(c12.593,5.525) 13.192,5.685 ccw(c13.417,5.747) v1(13.347,5.525)
pads on no net: D1.3 D1.5 J1.7 J1.8 J1.13 J1.14 J1.18 J1.19 J1.20 J4.A8 J4.B8 J4.None U1.5 U1.6 U3.B3 U3.C3 U3.C4

## Polygon pours and split planes (outlines as drawn)
GND on Top Layer "GND_L01_P014" (solid, pour order 14): 0,0 0,26 26,26 26,0
NetF1_1 on Top Layer "NETF1_1_L01_P008" (solid, pour order 8): 11.375,14.15 8.746,14.15 8.746,13.35 11.375,13.35
NetF1_1 on Top Layer "NETF1_1_L01_P009" (solid, pour order 9): 15.7,6.825 15.7,9.775 15.1,9.775 15.1,6.825
NetF1_1 on Top Layer "NETF1_1_L01_P010" (solid, pour order 10): 10.9,6.825 10.9,9.775 10.3,9.775 10.3,6.825
+3V3 on Top Layer "+3V3_L01_P011" (solid, pour order 11): 21,22.25 21,19.675 20.925,19.6 20.925,16.908 19.646,15.629 19.646,5.1 22.175,5.1 22.175,15.55 24.4,17.775 24.4,22.25
NetL1_1 on Top Layer "NETL1_1_L01_P012" (solid, pour order 12): 19.3,23.8 20.4,23.8 21,24.4 21,25 22.225,25 22.275,24.95 22.275,23.35 20.55,23.35 20.4,23.5 19.3,23.5
+VBAT on Top Layer "+VBAT_L01_P013" (solid, pour order 13): 8.325,24.525 7.525,23.725 5,23.725 5,25.475 16.025,25.475 16.975,24.525 16.975,23.85 17.1,23.725 18.2,23.725 18.2,23.05 16.2,23.05 16.2,23.725 15.4,24.525
+3V3 on Power "+3V3_L03_P015" (solid, pour order 15): 0,0 0,26 26,26 26,0
NetF1_1 on Power "NETF1_1_L03_P001" (solid, pour order 1): 15.685,9.775 11.85,9.775 10.5,11.125 10.5,14.175 8.725,14.175 8.675,14.175 8.675,9.9 10.4,8.175 15.685,8.175
GND on Bottom Layer "GND_L04_P007" (solid, pour order 7): 0,0 0,26 26,26 26,0
+VBAT on Bottom Layer "+VBAT_L04_P002" (solid, pour order 2): 0.5,25.475 7.525,25.475 7.525,23.725 0.5,23.725
GND on GND "GND_L02_P000" (solid, pour order 0): 0,0 0,26 26,26 26,0

## Keep-outs
Bottom Layer:
  rectangle: 11,13.075 15,17.075

## Silkscreen, mask and mechanical layers (free items; w line width, h text height)
Top Overlay:
  drawing of 8 lines, arcs and shapes, not listed
  text "Cube - v1.0 / Power and Battery Board" at 17.694,1.4 h1
Bottom Overlay:
  text "-" at 6.65,25.449 h3 r90
  text "+" at 9.699,23.7 h3
  text "LiPo 3.7V" at 4.525,20.649 h2.5 r90
  text "Place battery near NTCs" at 16.975,18.687 h1 r90
Dimensions:
  the board outline again, w0.254